# EAGLE board SUTAINA-Control-Switches-Board (EAGLE 9.6.2)
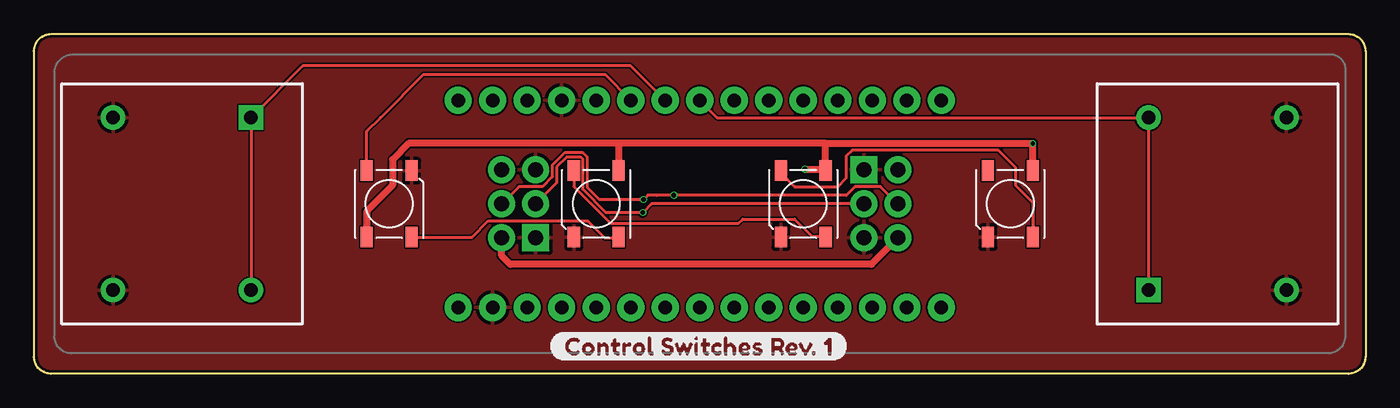
[diagram p0: board, top side]
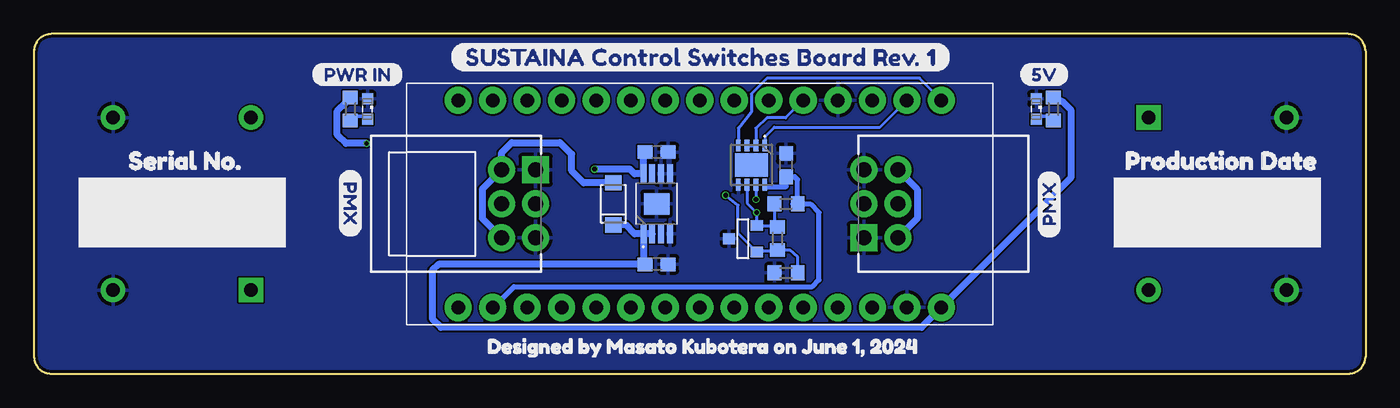
[diagram p1: board, bottom side, seen from below]

Size 98 x 25 mm. Coordinates in mm from the lower left corner, seen from the top.
Outline: 0,23.73 0,1.27 arc90 1.27,0 96.73,0 arc90 98,1.27 98,23.73 arc90 96.73,25 1.27,25 arc90 0,23.73
Copper layers (1*16): Top 0.035mm / dielectric 1.6mm / Bottom 0.035mm
Design rules "jlcpcb-2layers": minimum track width 5mil, minimum drill 0.3mm, track to track 5mil, track to pad 5mil, pad to pad 5mil, via to via 5mil, smd to smd 5mil, copper to edge 0.2mm, drill to drill 6mil, minimum pad ring 10mil, minimum via ring 3mil, stop-mask expansion 4mil, vias tented up to drill 0mil, thermal gap 10mil
Net classes: 0 default: width 0.203 mm; 1 signal: width 0.203 mm, clearance 0.127 mm; 2 power: width 0.381 mm; 3 low-power: width 0.254 mm; 4 high-power: width 0.508 mm

## Footprints (pad centres in the part's own frame; a part is rotated, then mirrored left to right if it is on the bottom)
C0603 = smd 1.1 x 1: 1 -0.85,0; 2 0.85,0
DF1B-6DP-2.5DS = drill 1.1 pad 2 square: 1 -2.5,1.25 | drill 1.1 pad 2: 2 -2.5,-1.25; 3 0,1.25; 4 0,-1.25; 5 2.5,1.25; 6 2.5,-1.25
SS34FA = smd 1.12 x 1.22: 1 -1.55,0; 2 1.55,0
SOT-23-3 = smd 0.787 x 0.889: 1 0.991,1.016; 2 -0.94,1.016; 3 0.025,-1.016
SOP65P490X110-9N = smd 1.4 x 0.45: 1 -2.2,0.975; 2 -2.2,0.325; 3 -2.2,-0.325; 4 -2.2,-0.975; 5 2.2,-0.975; 6 2.2,-0.325; 7 2.2,0.325; 8 2.2,0.975 | smd 1.57 x 1.89: 9 0,0
SON65P300X300X100-9N = smd 0.85 x 0.35: 1 -1.45,0.975; 2 -1.45,0.325; 3 -1.45,-0.325; 4 -1.45,-0.975; 5 1.45,-0.975; 6 1.45,-0.325; 7 1.45,0.325; 8 1.45,0.975 | smd 1.7 x 2.45: 9 0,0
WS2812B = smd 1.5 x 0.9: 1-VDD 2.45,-1.65; 2-DOUT 2.45,1.65; 3-GND -2.45,1.65; 4-DIN -2.45,-1.65
SML0603 = smd 0.8 x 0.8: A 0.75,0; C -0.75,0
NANO-ESP32 = drill 1 pad 2: 3V3-OUT -7.62,15.24; !RESET 7.62,-12.7; A0/D17 -7.62,10.16; A1/D18 -7.62,7.62; A2/D19 -7.62,5.08; A3/D20 -7.62,2.54; A4/D21 -7.62,0; A5/D22 -7.62,-2.54; A6/D23 -7.62,-5.08; A7/D24 -7.62,-7.62; B0 -7.62,12.7; B1 -7.62,-12.7; CIPO/D12 7.62,17.78; COPI/D11 7.62,15.24; D0/RX0 7.62,-15.24; D1/TX0 7.62,-17.78; D2 7.62,-7.62; D3 7.62,-5.08; D4 7.62,-2.54; D5 7.62,0; D6 7.62,2.54; D7 7.62,5.08; D8 7.62,7.62; D9 7.62,10.16; D10 7.62,12.7; GND1 -7.62,-15.24; GND2 7.62,-10.16; SCK/D13 -7.62,17.78; VIN-IN -7.62,-17.78; VUSB-OUT -7.62,-10.16
R0603 = smd 1 x 1.1: 1 -0.85,0; 2 0.85,0
JF15SP1 = drill 1 pad 1.778 square: 1 5.08,6.35 | drill 1 pad 1.778: 2 5.08,-6.35; 3 -5.08,6.35; 4 -5.08,-6.35

## Placement (x,y rotation side)
C1  10u  [C0603]  52.17,8.05 0 bottom
C2  10u  [C0603]  52.17,16.31 0 bottom
C3  0.1u  [C0603]  42.65,15.36 90 bottom
CH1  DF1B-6DP-2.5DS  [DF1B-6DP-2.5DS]  35.66,12.5 90 bottom
CH2  DF1B-6DP-2.5DS  [DF1B-6DP-2.5DS]  62.34,12.5 270 bottom
D1  SS34FA  [SS34FA]  55.35,12.5 90 bottom
D2  [SOT-23-3]  45.83,9.96 270 bottom
IC1  TPS7B82-Q1  [SOP65P490X110-9N]  52.17,12.5 90 bottom
IC2  SN65HVD75DRBR  [SON65P300X300X100-9N]  45.19,15.36 270 bottom
LED1  WS2812B  [WS2812B]  26.14,12.5 270 top
LED2  WS2812B  [WS2812B]  41.38,12.5 90 top
LED3  WS2812B  [WS2812B]  56.62,12.5 90 top
LED4  WS2812B  [WS2812B]  71.86,12.5 90 top
LED5  [SML0603]  24.23,19.48 270 bottom
LED6  [SML0603]  73.45,19.48 270 bottom
M1  NANO-ESP32  [NANO-ESP32]  49,12.5 90 bottom
R1  2k  [R0603]  22.96,19.48 90 bottom
R2  1k  [R0603]  74.72,19.48 90 bottom
R3  680  [R0603]  42.65,12.5 0 bottom
R4  120  [R0603]  43.28,9.96 90 bottom
R5  680  [R0603]  42.65,7.42 0 bottom
S1  JF15SP1F  [JF15SP1]  10.9,12.5 0 top
S2  JF15SP1C  [JF15SP1]  87.1,12.5 180 top
U$1  [SUSTAINA_CONTROL_SWITCHES_BOARD_REV#_10]  67.41,23.3 0 bottom
U$2  [PMX0]  23.28,9.96 90 bottom
U$3  PRODUCTION_DATE0  [PRODUCTION_DATE0]  18.84,15.68 0 bottom
U$4  SERIAL_NO#0  [SERIAL_NO#0]  92.18,15.68 0 bottom
U$5  [PMX0]  74.72,15.04 270 bottom
U$6  [CONTROL_SWITCHES_REV#_10]  37.89,2.02 0 top
U$7  [PWR_IN0]  77.58,22.02 0 bottom
U$8  [5V]  25.5,22.02 0 bottom
U$28  DESIGNED_BY_MASATO_KUBOTERA_ON_FEBRUARY_190DESIGNED_BY_MASATO_KUBOTERA_ON_FEBRUARY_190  [DESIGNED_BY_MASATO_KUBOTERA_ON_JUNE_1]  65.51,2.02 0 bottom

## Library data of the parts
C1-C3 = rcl; SPICEPREFIX: C
CH1 CH2 = DF1B-6DP-2.5DS
D1 = SS34FA
D2 = CDSOT23-SM712
IC1 = TPS7B82-Q1
IC2 = SN65HVD75DRBR
LED1-LED4 = WS2812B
LED5 LED6 = led
M1 = Arduino
R1-R5 = rcl; SPICEPREFIX: R
S1 S2 = NKK_Switches
U$1-U$8 U$28 = buzzard_labels

## Nets
+3V3 [power]: C3.1 IC2.8 M1.3V3-OUT R3.2
+5V [high-power]: C2.1 IC1.8 LED1.1-VDD LED2.1-VDD LED3.1-VDD LED4.1-VDD R2.2
BUTTON1 [signal]: M1.D4 S1.1 S1.2
BUTTON2 [signal]: M1.D5 S2.1 S2.2
DO-DI-1 [signal]: LED1.2-DOUT LED2.4-DIN
DO-DI-2 [signal]: LED2.2-DOUT LED3.4-DIN
DO-DI-3 [signal]: LED3.2-DOUT LED4.4-DIN
GND [power]: C1.2 C2.2 C3.2 CH1.1 CH1.5 CH2.1 CH2.5 D2.3 IC1.4 IC1.5 IC1.6 IC1.9 IC2.5 LED1.3-GND LED2.3-GND LED3.3-GND LED4.3-GND LED5.C LED6.C M1.GND1 M1.GND2 R5.1 S1.3 S1.4 S2.3 S2.4
LED-D-RX [low-power]: LED6.A R2.1
LED-D-TX [low-power]: LED5.A R1.1
NEOPIXEL [signal]: LED1.4-DIN M1.D3
PMX-VIN [high-power]: CH1.2 CH1.6 CH2.2 CH2.6 D1.2
REGULATOR-VIN [high-power]: C1.1 D1.1 IC1.1 IC1.2 M1.VIN-IN R1.2
RS485-DM [signal]: CH1.4 CH2.4 D2.1 IC2.7 R4.1 R5.2
RS485-DP [signal]: CH1.3 CH2.3 D2.2 IC2.6 R3.1 R4.2
RXD [signal]: IC2.1 M1.D0/RX0
TXD [signal]: IC2.4 M1.D1/TX0
TXDEN [signal]: IC2.2 IC2.3 M1.D2

## Tracks (layer width: path | path; a pad name or v marks a point on that pad's centre or on a via)
+3V3
  Bottom 0.381: 42.15,12.47 R3.2 | M1.3V3-OUT 64.19,4.91 62.68,6.42 40.71,6.42 40.22,6.91 40.22,11.87 40.85,12.5 R3.2 | 42.48,14.73 C3.1 | R3.2 41.8,14.29 42.02,14.51 C3.1 | IC2.8 44.08,13.77 42.65,13.77 C3.1
+5V  (via drill 0.3, 0.35)
  Top 0.508: LED1.1-VDD 24.49,11.96 26.39,13.86 26.39,15.77 27.59,16.96 27.6,16.95 43.03,16.95 | LED4.1-VDD 73.52,14.98 v73.52,16.95 58.27,16.95 | 58.27,16.95 43.03,16.95 | v56.73,15.06 58.16,15.06 LED3.1-VDD 58.27,16.95 | 43.03,16.95 LED2.1-VDD
  Bottom 0.508: R2.2 75.03,19.98 75.67,19.35 75.67,17.58 75.03,16.95 v73.52,16.95 | v56.73,15.06 54.14,15.06 53.78,14.7 IC1.8 53.15,16.29 53.13,16.31 C2.1 52.88,16.46
BUTTON1
  Top 0.203: S1.2 S1.1 19.79,22.66 43.92,22.66 M1.D4
BUTTON2
  Top 0.203: M1.D5 50.27,18.85 S2.2 S2.1
DO-DI-1
  Top 0.203: LED2.4-DIN 42.97,10.02 41.98,10.02 40.76,11.25 33.44,11.25 32.23,10.05 LED1.2-DOUT
DO-DI-2
  Top 0.203: LED3.4-DIN 58.25,10.11 57.26,10.11 55.98,11.38 52.17,11.38 51.87,11.08 42.42,11.08 39.73,13.77 LED2.2-DOUT
DO-DI-3
  Top 0.203: LED4.4-DIN 73.51,12.59 72.24,13.86 72.24,15.19 70.97,16.46 60.22,16.46 59.8,16.03 59.8,14.4 59.16,13.77 55.98,13.77 54.97,14.79 LED3.2-DOUT
GND
  pour Top: -1.8,26.47 -1.8,-1.47 99.8,-1.47 99.8,26.47
  pour Bottom: -3.07,27.74 -3.07,-2.74 101.07,-2.74 101.07,27.74
LED-D-RX
  Bottom 0.254: R2.1 74.67,18.94 73.68,18.94 73.52,18.77 LED6.A
LED-D-TX
  Bottom 0.254: R1.1 23,18.94 24.07,18.94 24.23,18.77 LED5.A
NEOPIXEL
  Top 0.203: M1.D3 42.02,22.02 28.68,22.02 25.5,18.85 24.49,17.84 LED1.4-DIN
PMX-VIN
  Top 0.508: CH1.2 34.41,8.69 35.05,8.05 61.64,8.05 CH2.6
  Bottom 0.508: CH1.2 32.98,11.43 32.98,13.57 CH1.6 | 63.53,9.94 CH2.6 65.02,11.43 65.02,13.57 CH2.2 63.59,16.27 62.84,17.02 59.29,17.02 58.43,16.16 58.43,14.95 57.53,14.05 D1.2
REGULATOR-VIN
  Bottom 0.508: R1.2 22.25,19.98 21.7,19.43 21.7,14.4 M1.VIN-IN 32.68,3.42 68.05,3.42 68.69,4.05 68.69,7.6 68.23,8.05 C1.1 53.05,8.12 53.15,8.23 IC1.1 | IC1.2 IC1.1 | IC1.1 53.78,10.3 54.44,10.95 D1.1
RS485-DM  (via drill 0.35)
  Top 0.203: CH2.4 62.31,13.77 60.43,13.77 59.8,13.13 v47.09,13.13 45.83,13.13 45.82,13.14 45.18,13.14 v44.87,12.82 41.62,12.82 40.74,13.7 40.74,15.93 40.41,16.26 39.05,16.26 38.14,15.35 38.14,14.49 37.42,13.77 35.69,13.77 CH1.4
  Bottom 0.203: R5.2 41.8,8.61 42.38,9.11 R4.1 43.39,9.45 43.8,9.03 44.79,9.03 D2.1 | 44.87,9.03 D2.1 | IC2.7 v44.87,12.82 | D2.1 46.17,10.33 46.17,12.41 v47.09,13.13
RS485-DP  (via drill 0.35)
  Top 0.203: CH2.3 45.45,12.5 v44.81,11.87 42.1,11.87 40.41,13.56 40.41,15.79 40.27,15.93 39.19,15.93 38.47,15.22 38.47,14.06 CH1.3
  Bottom 0.203: R3.1 43.5,11.03 R4.2 43.73,10.9 D2.2 v44.81,11.86 v44.81,11.87 45.52,12.56 IC2.6
RXD
  Bottom 0.203: IC2.1 44.22,17.44 43.51,18.14 35.73,18.14 M1.D0/RX0
TXD
  Bottom 0.203: IC2.4 46.16,18.08 45.2,19.28 45.2,20.59 44.05,21.75 32.82,21.75 31.25,20.18 M1.D1/TX0
TXDEN
  Bottom 0.203: IC2.3 45.45,16.79 44.87,16.79 IC2.2 44.87,18.08 44.04,18.82 42.67,18.82 M1.D2